# Altium PCB PCB1.PcbDoc
Units mil, origin at the board's own origin, x right, y up, seen from the top; angles counter-clockwise.
Board outline 6000 x 4000 mil, 2 copper layers (Top Layer, Bottom Layer); 4 components, 0 nets, 68 pads, 3 vias.
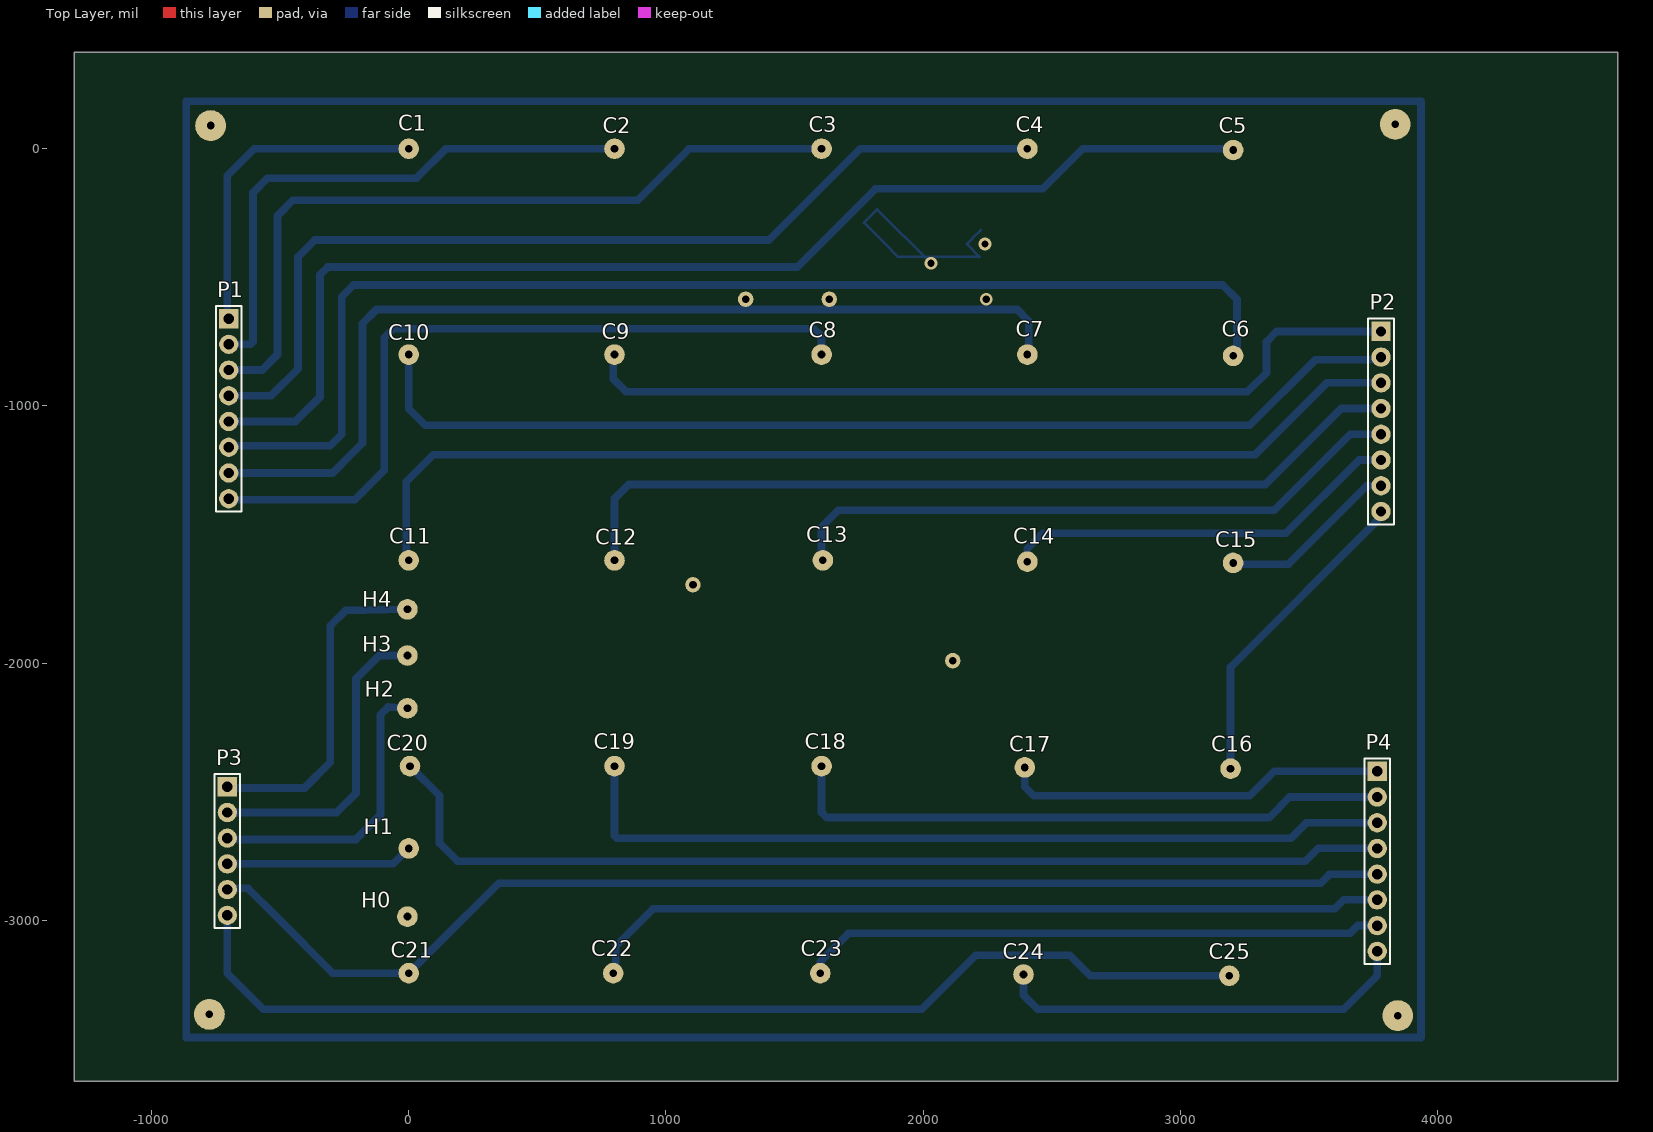
[diagram p0: Top Layer view]
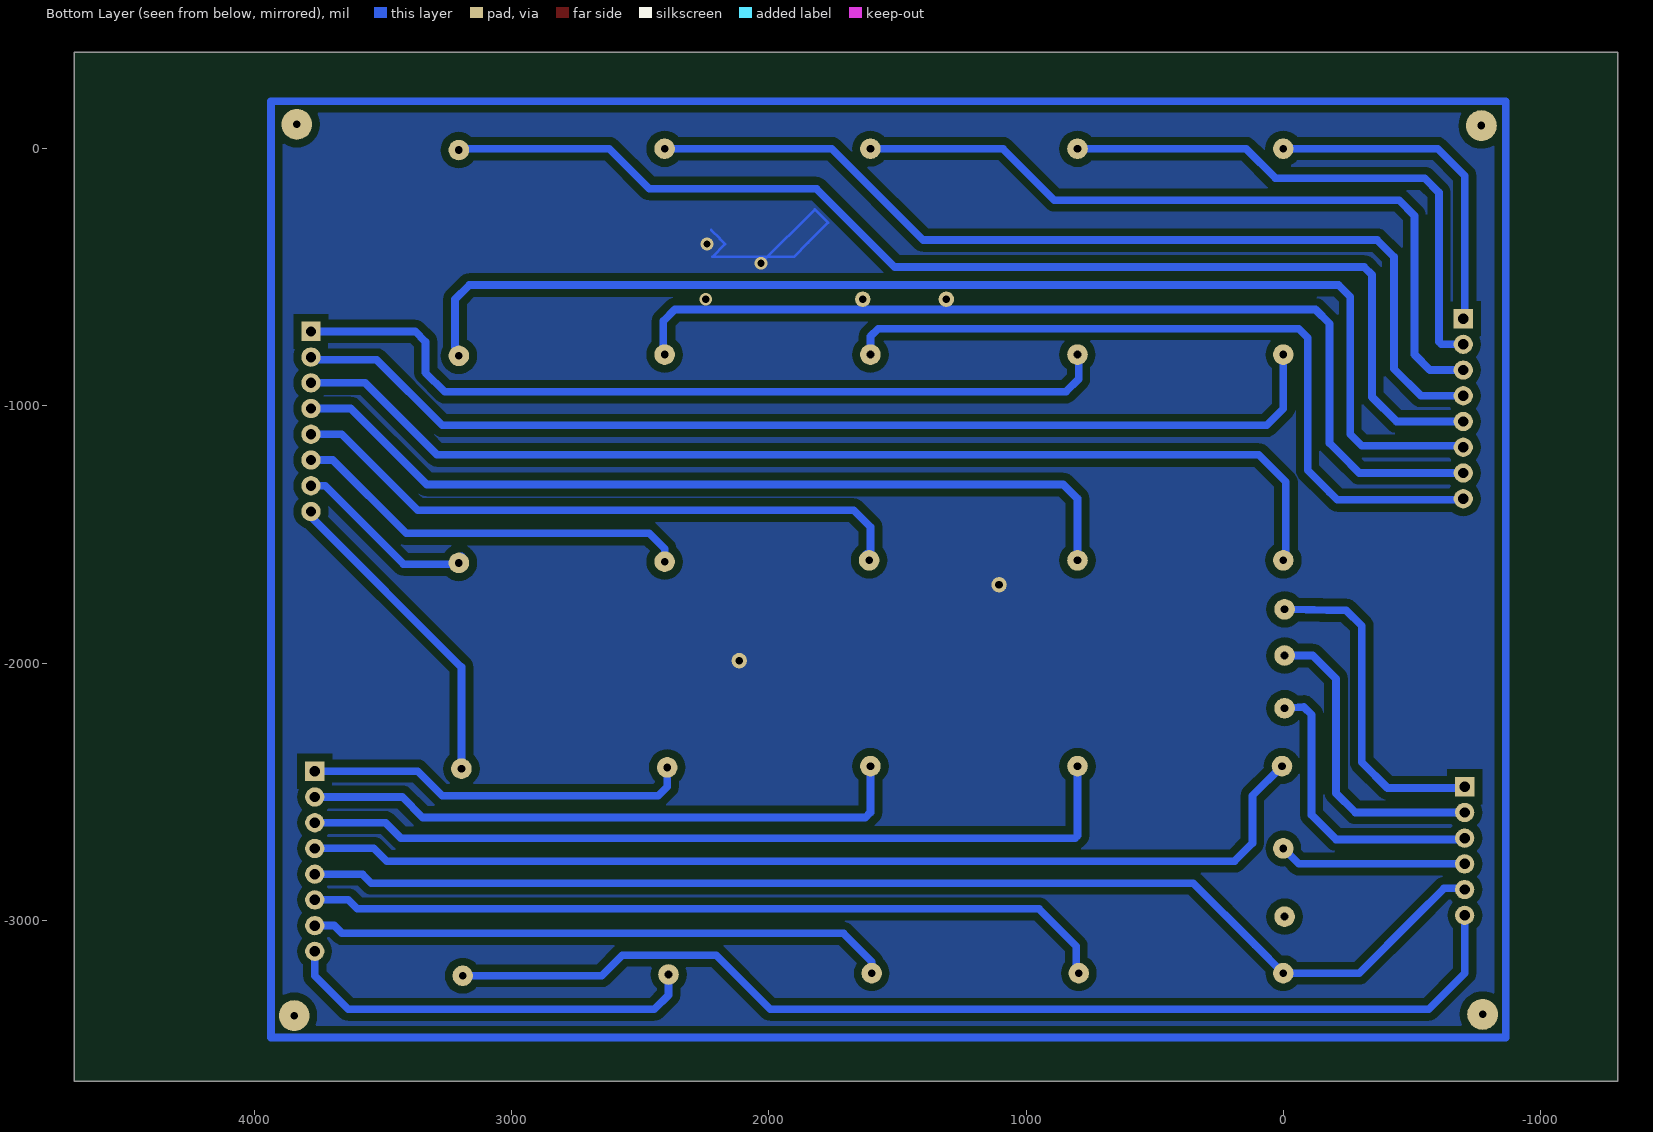
[diagram p1: Bottom Layer view, seen from below]

## Layer stack, top to bottom
Top Solder: solder mask 0.4, Solder Resist, Dk 3.5
Top Layer: signal copper 1.4
Dielectric 1: dielectric 12.6, FR-4, Dk 4.8
Bottom Layer: signal copper 1.4
Bottom Solder: solder mask 0.4, Solder Resist, Dk 3.5

## Board outline
-1300,-3625 4700,-3625 4700,375 -1300,375

## Design rules (kind name [scope] priority, off if disabled: settings)
Clearance [All] p1: gap=10 except(20: Arc-Via Arc-Fill Track-Via Track-Fill SMDPad-Via SMDPad-Fill THPad-Via THPad-Fill Via-Via Via-Fill Fill-Fill; 30: Arc-Poly Track-Poly SMDPad-Poly THPad-Poly Via-Poly Fill-Poly Poly-Poly)
PlaneConnect [All] p1: planeconnectstyle=Direct reliefexpansion=20 reliefentries=4 reliefconductorwidth=10 reliefairgap=10
PolygonConnect [All] p1: connectstyle=Direct reliefconductorwidth=10 reliefentries=4 polygonreliefangle="90 Angle" airgapwidth=10
RoutingVias [All] p1: holewidth=28 width=50 viastyle="Through Hole" minholewidth=28 minwidth=50 maxholewidth=28 maxwidth=50
SolderMaskExpansion [All] p1: expansion=4
Width [All] p1: maxlimit=30 minlimit=10 preferedwidth=10 minimp=50.000000 maximp=50.000000 favimp=50.000000
29 further rules are at their usual default settings.

## Components (designator, comment, footprint, x,y, rotation, side; value= is the part's Value field where it differs from the comment)
P1 "Header 1X8" "Header 1X8" -699.57,-660.37 r270 top
P2 "Header 1X8" "Header 1X8" 3780,-710 r270 top
P3 "Header 1X6" "Header 1X6" -705,-2480 r270 top
P4 "Header 1X8" "Header 1X8" 3765,-2420 r270 top

## Footprints (in the part's own frame and the unit in brackets; to place one, negate y for a bottom-side part, rotate by r counter-clockwise, add the part's x,y. Pads: shape width x height; smd on the part's side, far side on the other; paste and mask are expansions set on the pad)
"Header 1X6" [mil] "Connector; Header; 6 Position"
  rect 75x75 hole 40: 1(0,0)
  round 75 hole 40: 2(100,0) 3(200,0) 4(300,0) 5(400,0) 6(500,0)
  silkscreen extent -50,-50 550,50, body extent -50,-50 550,50, height 276
"Header 1X8" [mil] "Connector; Header; 8 Position"
  rect 75x75 hole 40: 1(0,0)
  round 75 hole 40: 2(100,0) 3(200,0) 4(300,0) 5(400,0) 6(500,0) 7(600,0) 8(700,0)
  silkscreen extent -50,-50 750,50, body extent -50,-50 750,50, height 276

## Part data
P1 P2 P4: "Header, 8-Pin"
P3: "Header, 6-Pin"

## Free pads (board coordinates)
  round 80 hole 30: 1(0,-3205) 1(0,-1600) 1(0,-800) 1(0,0) 1(5,-2400) 1(1600,-3205) 1(1605,-2400) 1(1605,-800) 1(1605,0) 1(1610,-1600) 2(795,-3205) 2(800,-2400) 2(800,-1600) 2(800,-800) 2(800,0) 2(2390,-3210) 2(2395,-2405) 2(2405,-1605) 2(2405,-800) 2(2405,0) 2(3190,-3215) 2(3195,-2410) 2(3205,-1610) 2(3205,-805) 2(3205,-5) 3(-5,-1790.38) 4(-5,-1970) 5(-5,-2175) 6(0,-2720) 7(-5,-2985)
  round 120 hole 30: 13(3845,-3370) 14(3835,95) 15(-770,90) 16(-775,-3365)
  round 60 hole 30: 17(1635,-585) 18(1310,-585) 19(1105,-1695) 20(2115,-1990)

## Via types
v1: diameter 50, hole 28, Top Layer to Bottom Layer, 3 vias

## Nets (pads, with @x,y where several pads share a name; then routed paths per layer and width w, separated by ;. In a path a pad name is that pad's centre, name@x,y a point inside that pad or via, vN(x,y) a via of type N, cw(c..) or ccw(c..) an arc to the next point about the centre after c; other vN are vias at no path point)
pads on no net: P1.1 P1.2 P1.3 P1.4 P1.5 P1.6 P1.7 P1.8 P2.1 P2.2 P2.3 P2.4 P2.5 P2.6 P2.7 P2.8 P3.1 P3.2 P3.3 P3.4 P3.5 P3.6 P4.1 P4.2 P4.3 P4.4 P4.5 P4.6 P4.7 P4.8
copper on no net: | length 96839.4
  Bottom Layer w10: v1(2030,-445) 1821.21,-236.21 1770,-287.43 1847.57,-365 1902.57,-420 2219.29,-420 2170,-370.71 2190,-350.71 2190,-349.29 2224.29,-315
  Bottom Layer w30: -865,-3325 -865,185 3935,185 3935,-3455 -865,-3455 -865,-3295 ; -721,-2479.69 -710.31,-2479.69 ; -705.28,-2679.62 -700.66,-2675 -690.66,-2685 -205,-2685 -110,-2590 -110,-2200 -80,-2170 -5,-2175 ; -705,-2980 -705,-3205 -565,-3345 -265,-3345 ; -705,-2880 -700,-2875 -625,-2875 -510,-2990 -295,-3205 0,-3205 110,-3095 350,-2855 3545,-2855 3580,-2820 3765,-2820 ; -705,-2780 -530,-2780 -60,-2780 0,-2720 ; -705,-2580 -280,-2580 -205,-2505 -205,-2060 -115,-1970 -5,-1970 ; -705,-2485 -405,-2485 -305,-2385 -305,-1855 -245,-1795 -5,-1790.38 ; -705,-650 -705,-105 -600,0 0,0 ; -700,-1155 -305,-1155 -260,-1110 -260,-575 -215,-530 3165,-530 3220,-585 3220,-770 3200,-790 3200,-795 ; -699.85,-860 -570,-860 -510,-800 -510,-260 -450,-200 890,-200 1090,0 1590,0 ; -699.57,-1260.37 -295.37,-1260.37 -225,-1190 -180,-1145 -180,-680 -125,-625 2365,-625 2410,-670 2410,-780 ; -699.57,-960.37 -535.37,-960.37 -430,-855 -430,-420 -365,-355 1400,-355 1755,0 2405,0 ; -699.57,-760.37 -615.37,-760.37 -605,-750 -605,-170 -550,-115 30,-115 145,0 800,0 ; -689.85,-1365 -230,-1365 -210,-1365 -180,-1335 -95,-1250 -95,-735 -60,-700 1575,-700 1605,-730 1605,-800 ; -684.13,-1060.06 -440.06,-1060.06 -345,-965 -345,-490 -315,-460 1510,-460 1815,-155 2465,-155 2620,0 3210,0 ; -280,-3345 1995,-3345 2205,-3135 2570,-3135 2650,-3215 3190,-3215 ; -10,-1580 -10,-1295 95,-1190 3290,-1190 3570,-910 3780,-910 ; 0,-2390 0,-2385 ; 0,-800 0,-1010 65,-1075 3270,-1075 3525,-820 3780,-820 ; 5,-2400 120,-2515 120,-2700 190,-2770 3485,-2770 3535.38,-2719.62 3764.72,-2719.62 ; 795,-3205 805,-3195 805,-3100 950,-2955 3600,-2955 3635,-2920 3765,-2920 ; 795,-805 795,-820 795,-895 845,-945 3260,-945 3335,-870 3335,-750 3375,-710 3780,-710 ; 800,-2400 800,-2670 810,-2680 3430,-2680 3490.38,-2619.62 3764.72,-2619.62 ; 800,-1600 800,-1360 855,-1305 3330,-1305 3625.38,-1009.62 3779.72,-1009.62 ; 1600,-3205 1600,-3160 1710,-3050 3659.25,-3050 3689.62,-3019.62 3764.72,-3019.62 ; 1605,-2400 1605,-2580 1625,-2600 3345,-2600 3425.38,-2519.62 3764.72,-2519.62 ; 1620,-1575 1605,-1575 1605,-1470 1670,-1405 3365,-1405 3660,-1110 3780,-1110 ; 2390,-3210 2390,-3290 2445,-3345 3635,-3345 3764.72,-3215.28 3764.72,-3119.62 ; 2395,-2405 2395,-2480 2430,-2515 3270,-2515 3365,-2420 3765,-2420 ; 2405,-1605 2405,-1555 2465,-1495 3410,-1495 3695,-1210 3780,-1210 ; 3190,-1590 3194.62,-1585.38 ; 3195,-2410 3195,-2240 3195,-2015 3779.72,-1430.28 3779.72,-1409.62 ; 3205,-1610 3210,-1615 3420,-1615 3725,-1310 3780,-1310 ; 3780,-1420 3780,-1410
  other v1: 2245,-585 2240,-370

## Polygon pours and split planes (outlines as drawn)
no net on Bottom Layer "Bottom Layer-No Net" (solid, pour order 4): -865,175 -855,185 3920,185 3920,-3470 3905,-3455 -850,-3455 -850,185

## Silkscreen, mask and mechanical layers (free items; w line width, h text height)
Top Overlay:
  text "C1" at -40,70 h60
  text "C3" at 1555,65 h60
  text "C4" at 2360,65 h60
  text "C2" at 755,60 h60
  text "C5" at 3150,60 h60
  text "C7" at 2360,-730 h60
  text "C6" at 3160,-730 h60
  text "C8" at 1555,-735 h60
  text "C9" at 750,-740 h60
  text "C10" at -80,-745 h60
  text "C13" at 1545,-1530 h60
  text "C11" at -75,-1535 h60
  text "C14" at 2350,-1535 h60
  text "C12" at 725,-1540 h60
  text "C15" at 3135,-1550 h60
  text "H4" at -180,-1780 h60
  text "H3" at -180,-1955 h60
  text "H2" at -170,-2130 h60
  text "C19" at 720,-2335 h60
  text "C18" at 1540,-2335 h60
  text "C20" at -85,-2340 h60
  text "C17" at 2335,-2345 h60
  text "C16" at 3120,-2345 h60
  text "H1" at -175,-2665 h60
  text "H0" at -185,-2950 h60
  text "C22" at 710,-3140 h60
  text "C23" at 1525,-3140 h60
  text "C21" at -70,-3145 h60
  text "C24" at 2310,-3150 h60
  text "C25" at 3110,-3150 h60